# EAGLE board SPv2-twin (EAGLE 6.5.0)
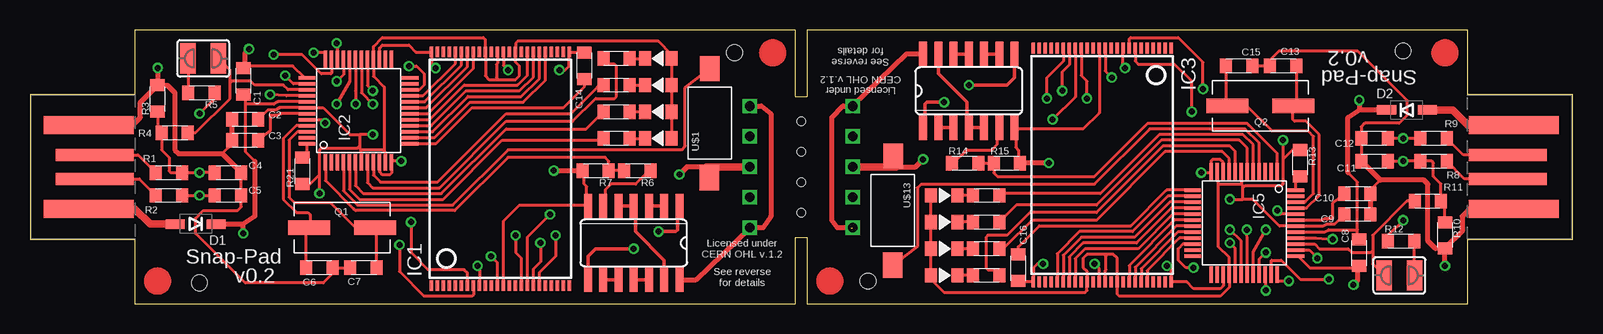
[diagram p0: board, top side]
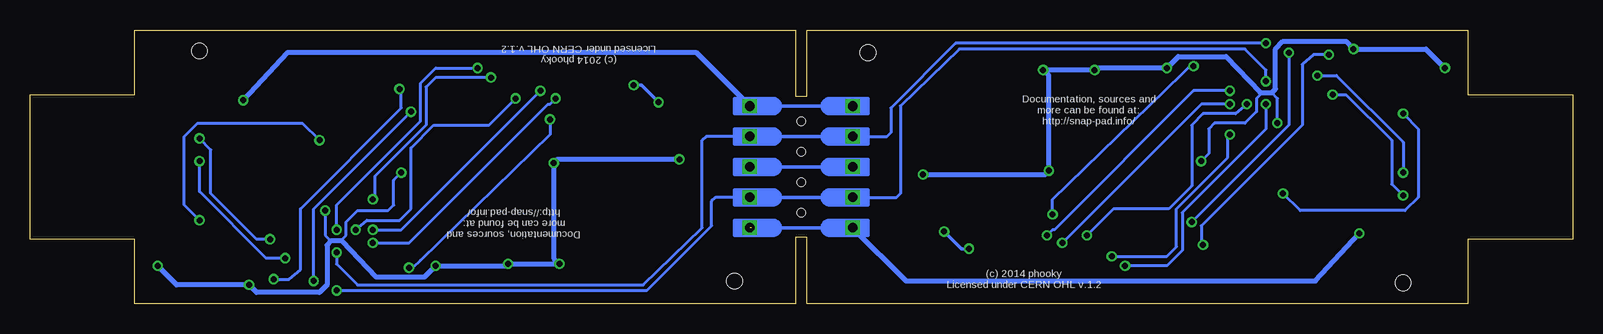
[diagram p1: board, bottom side, seen from below]

Size 128.59 x 22.86 mm. Coordinates in mm from the lower left corner, seen from the top.
Outline: 8.73,0 63.82,0 63.82,5.56 64.77,5.56 64.77,0 119.86,0 119.86,5.4 128.59,5.4 128.59,17.46 119.86,17.46 119.86,22.86 64.77,22.86 64.77,17.3 63.82,17.3 63.82,22.86 8.73,22.86 8.73,17.46 0,17.46 0,5.4 8.73,5.4 8.73,0
Copper layers (1*16): Top 0.0356mm / dielectric 1.5011mm / Bottom 0.0356mm
Design rules "LaenPCBOrder": minimum track width 6mil, minimum drill 13mil, track to track 6mil, track to pad 6mil, pad to pad 6mil, via to via 6mil, smd to smd 6mil, copper to edge 15mil, drill to drill 6mil, minimum pad ring 7mil, minimum via ring 7mil, stop-mask expansion 3mil, vias tented up to drill 0mil, thermal gap 10mil
Holes 1.3 mm at 14.13,1.75 58.74,20.95 114.46,21.11 69.85,1.91
Holes 0.7 mm at 64.29,15.24 64.29,12.7 64.29,10.16 64.29,7.62

## Footprints (pad centres in the part's own frame; a part is rotated, then mirrored left to right if it is on the bottom)
R0805 = smd 1 x 1.2: P$1 1.1,0; P$2 -1.1,0
SOD123 = smd 1.6 x 0.8: ANODE 1.7,0; CATHODE -1.7,0
TSOP48 = smd 0.9 x 0.3: 1 -9.75,5.75; 2 -9.75,5.25; 3 -9.75,4.75; 4 -9.75,4.25; 5 -9.75,3.75; 6 -9.75,3.25; 7 -9.75,2.75; 8 -9.75,2.25; 9 -9.75,1.75; 10 -9.75,1.25; 11 -9.75,0.75; 12 -9.75,0.25; 13 -9.75,-0.25; 14 -9.75,-0.75; 15 -9.75,-1.25; 16 -9.75,-1.75; 17 -9.75,-2.25; 18 -9.75,-2.75; 19 -9.75,-3.25; 20 -9.75,-3.75; 21 -9.75,-4.25; 22 -9.75,-4.75; 23 -9.75,-5.25; 24 -9.75,-5.75; 25 9.75,-5.75; 26 9.75,-5.25; 27 9.75,-4.75; 28 9.75,-4.25; 29 9.75,-3.75; 30 9.75,-3.25; 31 9.75,-2.75; 32 9.75,-2.25; 33 9.75,-1.75; 34 9.75,-1.25; 35 9.75,-0.75; 36 9.75,-0.25; 37 9.75,0.25; 38 9.75,0.75; 39 9.75,1.25; 40 9.75,1.75; 41 9.75,2.25; 42 9.75,2.75; 43 9.75,3.25; 44 9.75,3.75; 45 9.75,4.25; 46 9.75,4.75; 47 9.75,5.25; 48 9.75,5.75
PT48 = smd 1.4 x 0.3: 1 -4.3,2.75; 2 -4.3,2.25; 3 -4.3,1.75; 4 -4.3,1.25; 5 -4.3,0.75; 6 -4.3,0.25; 7 -4.3,-0.25; 8 -4.3,-0.75; 9 -4.3,-1.25; 10 -4.3,-1.75; 11 -4.3,-2.25; 12 -4.3,-2.75; 25 4.3,-2.75; 26 4.3,-2.25; 27 4.3,-1.75; 28 4.3,-1.25; 29 4.3,-0.75; 30 4.3,-0.25; 31 4.3,0.25; 32 4.3,0.75; 33 4.3,1.25; 34 4.3,1.75; 35 4.3,2.25; 36 4.3,2.75 | smd 0.3 x 1.4: 13 -2.75,-4.3; 14 -2.25,-4.3; 15 -1.75,-4.3; 16 -1.25,-4.3; 17 -0.75,-4.3; 18 -0.25,-4.3; 19 0.25,-4.3; 20 0.75,-4.3; 21 1.25,-4.3; 22 1.75,-4.3; 23 2.25,-4.3; 24 2.75,-4.3; 37 2.75,4.3; 38 2.25,4.3; 39 1.75,4.3; 40 1.25,4.3; 41 0.75,4.3; 42 0.25,4.3; 43 -0.25,4.3; 44 -0.75,4.3; 45 -1.25,4.3; 46 -1.75,4.3; 47 -2.25,4.3; 48 -2.75,4.3
SO14 = smd 0.66 x 2.032: 1 -3.81,-3.073; 2 -2.54,-3.073; 3 -1.27,-3.073; 4 0,-3.073; 5 1.27,-3.073; 6 2.54,-3.073; 7 3.81,-3.073; 8 3.81,3.073; 9 2.54,3.073; 10 1.27,3.073; 11 0,3.073; 12 -1.27,3.073; 13 -2.54,3.073; 14 -3.81,3.073
USB-A-PCB = smd 7.5 x 1.5: 5V -0.2,-3.5; GND -0.2,3.5 | smd 6.5 x 1: USB_M 0.3,-1; USB_P 0.3,1
CSM-3X = smd 3.5 x 1.2: P$1 -2.75,0; P$2 2.75,0
SJW = smd 1.27 x 2.54: 1 -1.27,0; 2 1.27,0
FSMSM = smd 2.1 x 1.6: P$1 -4.55,0.05; P$2 4.55,0
SNAP-HALF = drill 0.8 square: P$1 -3.81,5.08; P$2 -3.81,2.54; P$3 -3.81,0; P$4 -3.81,-2.54; P$5 -3.81,-5.08
LED0805 = smd 1 x 1.2: ANODE -1.1,0; CATHODE 1.1,0

## Placement (x,y rotation side)
C1  4.7uF  [R0805]  17.78,18.57 270 top
C2  220nF  [R0805]  17.94,15.4 0 top
C3  220nF  [R0805]  17.94,13.65 0 top
C4  10pF  [R0805]  16.51,10.95 180 top
C5  10pF  [R0805]  16.51,9.05 180 top
C6  20pF  [R0805]  24.13,3.02 0 top
C7  20pF  [R0805]  27.78,3.02 180 top
C8  4.7uF  [R0805]  110.81,4.29 90 top
C9  220nF  [R0805]  110.65,7.46 180 top
C10  220nF  [R0805]  110.65,9.21 180 top
C11  10pF  [R0805]  112.08,11.91 0 top
C12  10pF  [R0805]  112.08,13.81 0 top
C13  20pF  [R0805]  104.46,19.84 180 top
C14  470nF  [R0805]  46.2,19.84 270 top
C15  20pF  [R0805]  100.81,19.84 0 top
C16  470nF  [R0805]  82.39,3.02 90 top
D1  [SOD123]  13.81,6.67 180 top
D2  [SOD123]  114.78,16.19 0 top
IC1  S34ML0XG1  [TSOP48]  39.21,11.27 90 top
IC2  F5508  [PT48]  27.38,16.12 90 top
IC3  S34ML0XG1  [TSOP48]  89.38,11.59 270 top
IC4  74LS14D  [SO14]  50.32,5.08 180 top
IC5  F5508  [PT48]  101.21,6.74 270 top
IC6  74LS14D  [SO14]  78.26,17.78 0 top
JP1  USBPCB  [USB-A-PCB]  5.08,11.43 0 top
JP2  USBPCB  [USB-A-PCB]  123.51,11.43 180 top
Q1  12MHz  [CSM-3X]  26.04,6.35 0 top
Q2  12MHz  [CSM-3X]  102.55,16.51 180 top
R1  27 5%  [R0805]  11.59,10.95 0 top
R2  27 5%  [R0805]  11.59,9.05 0 top
R3  1M  [R0805]  10.64,17.14 90 top
R4  1.4K 1%  [R0805]  12.06,14.29 180 top
R5  100 5%  [R0805]  14.29,17.62 180 top
R6  1.4k  [R0805]  50.64,11.11 180 top
R7  1.4k  [R0805]  47.15,11.11 180 top
R8  27 5%  [R0805]  117,11.91 180 top
R9  27 5%  [R0805]  117,13.81 180 top
R10  1M  [R0805]  117.95,5.71 270 top
R11  1.4K 1%  [R0805]  116.52,8.57 0 top
R12  100 5%  [R0805]  114.3,5.24 0 top
R13  1M  [R0805]  105.89,11.75 270 top
R14  1.4k  [R0805]  77.95,11.75 0 top
R15  1.4k  [R0805]  81.44,11.75 0 top
R21  1M  [R0805]  22.7,11.11 90 top
SJ1  [SJW]  14.45,20.48 180 top
SJ2  [SJW]  114.14,2.38 0 top
U$1  FSMSM  [FSMSM]  56.67,15.08 90 top
U$2  SNAP-HALF  [SNAP-HALF]  63.82,11.43 180 bottom
U$3  FIDUCAL  [FIDUCAL]  10.64,1.91 0 top
U$4  130  [R0805]  48.9,13.81 0 top
U$5  LED  [LED0805]  52.39,13.81 180 top
U$6  LED  [LED0805]  52.39,16.03 180 top
U$7  LED  [LED0805]  52.39,20.48 180 top
U$8  LED  [LED0805]  52.39,18.26 180 top
U$9  130  [R0805]  48.9,16.03 0 top
U$10  130  [R0805]  48.9,20.48 0 top
U$11  130  [R0805]  48.9,18.26 0 top
U$12  FIDUCAL  [FIDUCAL]  61.91,20.95 0 top
U$13  FSMSM  [FSMSM]  71.91,7.78 270 top
U$14  LED  [LED0805]  76.2,9.05 0 top
U$15  LED  [LED0805]  76.2,6.83 0 top
U$16  LED  [LED0805]  76.2,2.38 0 top
U$17  LED  [LED0805]  76.2,4.6 0 top
U$18  130  [R0805]  79.69,9.05 180 top
U$19  130  [R0805]  79.69,6.83 180 top
U$20  130  [R0805]  79.69,2.38 180 top
U$21  130  [R0805]  79.69,4.6 180 top
U$22  SNAP-HALF  [SNAP-HALF]  64.77,11.43 0 bottom
U$23  FIDUCAL  [FIDUCAL]  117.95,20.95 180 top
U$24  FIDUCAL  [FIDUCAL]  66.67,1.91 180 top

## Library data of the parts
C1-C16 D1 D2 Q1 Q2 R1-R15 R21 U$1-U$24 = Passives
IC1 IC3 = Flash
IC2 IC5 = TI_MSP430_v16
IC4 IC6 = 74xx-us
JP1 JP2 = SparkFun-Connectors
SJ1 SJ2 = jumper

## Nets
!CE!_A: IC1.9 IC2.32
!CE!_A1: IC3.9 IC5.32
!RE!_A: IC1.8 IC2.35
!RE!_A1: IC3.8 IC5.35
!RST_A!: IC2.48 R21.P$1
!RST_A!1: IC5.48 R13.P$1
!WE!_A: IC1.18 IC2.30
!WE!_A1: IC3.18 IC5.30
!WP!_A: IC1.19 IC2.29
!WP!_A1: IC3.19 IC5.29
+1V8_A: C3.P$1 IC2.43
+1V8_A1: C10.P$1 IC5.43
+3V3_A: C2.P$1 IC1.12 IC1.34 IC1.37 IC1.39 IC2.7 IC2.11 IC2.28 IC2.42 R5.P$2 R21.P$2 U$5.ANODE U$6.ANODE U$7.ANODE U$8.ANODE
+3V3_A1: C9.P$1 IC3.12 IC3.34 IC3.37 IC3.39 IC5.7 IC5.11 IC5.28 IC5.42 R12.P$2 R13.P$2 U$14.ANODE U$15.ANODE U$16.ANODE U$17.ANODE
ALE_A: IC1.17 IC2.22
ALE_A1: IC3.17 IC5.22
CLE_A: IC1.16 IC2.31
CLE_A1: IC3.16 IC5.31
D+_A: C4.P$1 IC2.38 R1.P$1 R3.P$2 R4.P$1
D+_A1: C11.P$1 IC5.38 R8.P$1 R10.P$2 R11.P$1
D-_A: C5.P$1 IC2.40 R2.P$1
D-_A1: C12.P$1 IC5.40 R9.P$1
DOUT: IC2.1 R6.P$1 R7.P$2
DOUT1: IC5.1 R14.P$1 R15.P$2
GND: C1.P$2 C2.P$2 C3.P$2 C4.P$2 C5.P$2 C6.P$1 C7.P$1 C8.P$2 C9.P$2 C10.P$2 C11.P$2 C12.P$2 C13.P$1 C14.P$2 C15.P$1 C16.P$2 IC1.13 IC1.25 IC1.36 IC1.48 IC2.10 IC2.12 IC2.27 IC2.37 IC2.44 IC3.13 IC3.25 IC3.36 IC3.48 IC4.7 IC5.10 IC5.12 IC5.27 IC5.37 IC5.44 IC6.7 JP1.GND JP2.GND R3.P$1 R7.P$1 R10.P$1 R15.P$1 U$1.P$1 U$2.P$3 U$13.P$1 U$22.P$3
N$1: JP1.USB_P R1.P$2
N$2: JP1.USB_M R2.P$2
N$3: C14.P$1 IC2.13
N$4: R5.P$1 SJ1.2
N$5: IC4.11 IC4.12
N$6: IC4.9 IC4.10
N$7: IC4.1 IC4.8
N$8: IC4.2 IC4.3
N$9: IC4.4 IC4.5 IC4.13
N$10: IC4.6 R6.P$2
N$11: JP2.USB_P R8.P$2
N$12: JP2.USB_M R9.P$2
N$13: C16.P$1 IC5.13
N$14: U$16.CATHODE U$20.P$1
N$15: U$15.CATHODE U$19.P$1
N$16: U$14.CATHODE U$18.P$1
N$17: U$17.CATHODE U$21.P$1
N$18: IC5.9 U$21.P$2
N$19: IC2.9 U$11.P$2
N$20: IC5.8 U$20.P$2
N$21: IC5.6 U$19.P$2
N$22: U$7.CATHODE U$10.P$1
N$23: U$6.CATHODE U$9.P$1
N$24: U$4.P$1 U$5.CATHODE
N$25: U$8.CATHODE U$11.P$1
N$26: IC2.8 U$10.P$2
N$27: IC2.6 U$9.P$2
N$28: IC2.5 U$4.P$2
N$29: IC5.5 U$18.P$2
N$30: R12.P$1 SJ2.2
N$31: D2.ANODE JP2.5V
N$32: IC6.11 IC6.12
N$33: D1.ANODE JP1.5V
N$34: IC6.9 IC6.10
N$35: IC6.1 IC6.8
N$36: IC6.2 IC6.3
N$37: IC6.4 IC6.5 IC6.13
N$38: IC6.6 R14.P$2
NANDIO_A0: IC1.29 IC2.14
NANDIO_A1: IC1.30 IC2.15
NANDIO_A2: IC1.31 IC2.16
NANDIO_A3: IC1.32 IC2.17
NANDIO_A4: IC1.41 IC2.18
NANDIO_A5: IC1.42 IC2.19
NANDIO_A6: IC1.43 IC2.20
NANDIO_A7: IC1.44 IC2.21
NANDIO_A8: IC3.29 IC5.14
NANDIO_A9: IC3.30 IC5.15
NANDIO_A10: IC3.31 IC5.16
NANDIO_A11: IC3.32 IC5.17
NANDIO_A12: IC3.41 IC5.18
NANDIO_A13: IC3.42 IC5.19
NANDIO_A14: IC3.43 IC5.20
NANDIO_A15: IC3.44 IC5.21
PUR_A: IC2.39 R4.P$2 SJ1.1
PUR_A1: IC5.39 R11.P$2 SJ2.1
R/B_A: IC1.7 IC2.36
R/B_A1: IC3.7 IC5.36
RX_A: IC2.34 IC5.33 U$2.P$4 U$22.P$2
SW_A: IC2.4 U$1.P$2
SW_A1: IC5.4 U$13.P$2
TCK_A: IC2.26
TCK_A1: IC5.26
TDI_A: IC2.24
TDI_A1: IC5.24
TDO_A: IC2.23
TDO_A1: IC5.23
TMS_A: IC2.25
TMS_A1: IC5.25
TST_A: IC2.47
TST_A1: IC5.47
TX_A: IC2.33 IC5.34 U$2.P$2 U$22.P$4
VBUS: C1.P$1 C8.P$1 D1.CATHODE D2.CATHODE IC2.41 IC4.14 IC5.41 IC6.14 U$2.P$1 U$2.P$5 U$22.P$1 U$22.P$5
XT2IN_A: C6.P$2 IC2.45 Q1.P$1
XT2IN_A1: C13.P$2 IC5.45 Q2.P$1
XT2OUT_A: C7.P$2 IC2.46 Q1.P$2
XT2OUT_A1: C15.P$2 IC5.46 Q2.P$2

## Tracks (layer width: path | path; a pad name or v marks a point on that pad's centre or on a via)
!CE!_A  (via drill 0.5)
  Top 0.254: IC2.32 26.63,18.53 v25.56,16.67 | v37.31,3.17 37.47,3.02 IC1.9
  Bottom 0.254: v25.56,16.67 25.56,14.61 32.54,7.62 32.54,4.45 33.81,3.17 v37.31,3.17
!CE!_A1  (via drill 0.5)
  Top 0.254: IC5.32 101.96,4.33 v103.03,6.19 | v91.28,19.68 91.12,19.84 IC3.9
  Bottom 0.254: v103.03,6.19 103.03,8.26 96.04,15.24 96.04,18.41 94.77,19.68 v91.28,19.68
!RE!_A  (via drill 0.5)
  Top 0.254: IC2.35 25.13,19.25 25.08,19.21 24.29,19.21 22.7,20.8 v20.32,20.8 | v30.8,4.92 30.8,2.7 32.86,0.64 36.83,0.64 36.96,0.77 IC1.8
  Bottom 0.254: v20.32,20.8 21.59,20.8 22.54,20 22.54,14.92 30.96,6.51 30.96,5.08 v30.8,4.92
!RE!_A1  (via drill 0.5)
  Top 0.254: IC5.35 103.46,3.6 103.5,3.65 104.3,3.65 105.89,2.06 v108.27,2.06 | v97.79,17.94 97.79,20.16 95.73,22.23 91.76,22.23 91.63,22.09 IC3.8
  Bottom 0.254: v108.27,2.06 107,2.06 106.05,2.86 106.05,7.94 97.63,16.35 97.63,17.78 v97.79,17.94
!RST_A!
  Top 0.254: IC2.48 23.08,12.59 R21.P$1
!RST_A!1
  Top 0.254: IC5.48 105.51,10.27 R13.P$1
!WE!_A  (via drill 0.5)
  Top 0.254: IC2.30 27.63,17.61 v28.57,16.67 | v42.55,5.08 42.55,3.49 41.96,2.91 IC1.18
  Bottom 0.254: v28.57,16.67 30.96,16.67 v42.55,5.08
!WE!_A1  (via drill 0.5)
  Top 0.254: IC5.30 100.96,5.25 v100.01,6.19 | v86.04,17.78 86.04,19.37 86.63,19.95 IC3.18
  Bottom 0.254: v100.01,6.19 97.63,6.19 v86.04,17.78
!WP!_A  (via drill 0.5)
  Top 0.254: IC2.29 28.13,18.23 v28.57,17.78 | v43.81,5.71 43.81,3.97 42.46,2.62 IC1.19
  Bottom 0.254: v28.57,17.78 31.59,17.78 43.18,6.19 43.34,6.19 v43.81,5.71
!WP!_A1  (via drill 0.5)
  Top 0.254: IC5.29 100.46,4.63 v100.01,5.08 | v84.77,17.14 84.77,18.89 86.13,20.25 IC3.19
  Bottom 0.254: v100.01,5.08 97,5.08 85.41,16.67 85.25,16.67 v84.77,17.14
+1V8_A
  Top 0.254: IC2.43 20.95,15.87 20.64,15.72 20,15.72 20,14.45 19.37,13.98 C3.P$1
+1V8_A1
  Top 0.254: IC5.43 107.64,6.99 107.95,7.14 108.58,7.14 108.58,8.41 109.22,8.88 C10.P$1
+3V3_A  (via drill 0.5)
  Top 0.254: IC2.11 29.63,12.6 29.53,12.86 | 29.53,12.86 27.62,12.86 | IC2.7 27.63,12.55 27.62,12.86 | U$5.ANODE U$6.ANODE U$8.ANODE U$7.ANODE 53.49,20.81 52.39,21.91 40.64,21.91 40.48,21.75 40.48,21.04 IC1.34 40.48,21 40.48,20.16 40.8,19.84 40.8,19.05 40.48,18.73 39.05,18.73 | IC1.37 38.96,20.07 38.89,20 38.89,18.89 39.05,18.73 | 39.05,18.73 38.26,18.73 37.96,19.03 IC1.39 37.94,21.04 37.94,22.07 37.78,22.23 29.37,22.23 28.63,21.48 IC2.28 28.63,19 29.53,18.1 29.53,12.86 | C2.P$1 19.83,16.19 20.48,16.19 20.81,16.37 IC2.42 24.43,16.37 26.67,14.13 27.46,14.13 | 27.62,12.86 27.46,13.02 27.46,13.18 | 27.46,14.13 27.46,13.18 | IC1.12 38.96,3.42 v38.42,3.97 | v28.57,14.13 27.46,14.13 | R21.P$2 23.35,10.01 24.13,10.79 | 24.13,10.79 24.13,12.86 24.29,13.02 27.3,13.02 27.46,13.18 | R5.P$2 15.39,17.13 v14.13,15.88 | v24.13,9.21 24.13,10.79
  Bottom 0.254: v38.42,3.97 33.81,3.97 33.02,4.76 33.02,7.94 28.73,12.22 28.73,13.97 v28.57,14.13 | v14.13,15.88 12.86,14.61 12.86,8.89 13.97,7.78 22.7,7.78 v24.13,9.21
+3V3_A1  (via drill 0.5)
  Top 0.254: IC5.11 98.96,10.26 99.06,10 | 99.06,10 100.97,10 | IC5.7 100.96,10.31 100.97,10 | U$14.ANODE U$15.ANODE U$17.ANODE U$16.ANODE 75.1,2.05 76.2,0.95 87.95,0.95 88.11,1.11 88.11,1.82 IC3.34 88.11,1.86 88.11,2.7 87.79,3.02 87.79,3.81 88.11,4.13 89.53,4.13 | IC3.37 89.63,2.79 89.69,2.86 89.69,3.97 89.53,4.13 | 89.53,4.13 90.33,4.13 90.63,3.83 IC3.39 90.65,1.82 90.65,0.79 90.81,0.64 99.22,0.64 99.96,1.38 IC5.28 99.96,3.86 99.06,4.76 99.06,10 | C9.P$1 108.75,6.67 108.11,6.67 107.77,6.49 IC5.42 104.16,6.49 101.92,8.73 101.12,8.73 | 100.97,10 101.12,9.84 101.12,9.68 | 101.12,8.73 101.12,9.68 | IC3.12 89.63,19.43 v90.17,18.89 | v100.01,8.73 101.12,8.73 | R13.P$2 105.24,12.85 104.46,12.06 | 104.46,12.06 104.46,10 104.3,9.84 101.28,9.84 101.12,9.68 | R12.P$2 113.2,5.73 v114.46,6.99 | v104.46,13.65 104.46,12.06
  Bottom 0.254: v90.17,18.89 94.77,18.89 95.57,18.1 95.57,14.92 99.85,10.64 99.85,8.89 v100.01,8.73 | v114.46,6.99 115.73,8.26 115.73,13.97 114.62,15.08 105.89,15.08 v104.46,13.65
ALE_A  (via drill 0.5)
  Top 0.254: IC1.17 41.46,5.58 v43.34,7.46 | v31.59,19.84 32.23,19.84 32.86,19.21 32.86,18.26 32.47,17.87 IC2.22
  Bottom 0.254: v43.34,7.46 43.34,8.73 32.54,19.21 31.91,19.84 v31.59,19.84
ALE_A1  (via drill 0.5)
  Top 0.254: IC3.17 87.13,17.28 v85.25,15.4 | v97,3.02 96.36,3.02 95.73,3.65 95.73,4.6 96.11,4.99 IC5.22
  Bottom 0.254: v85.25,15.4 85.25,14.13 96.04,3.65 96.68,3.02 v97,3.02
CLE_A  (via drill 0.5)
  Top 0.254: IC2.31 27.13,17.76 v27.15,16.67 | IC1.16 40.96,3.81 40.48,4.29 v40.48,5.71
  Bottom 0.254: v27.15,16.67 28.1,15.88 30.8,15.88 31.75,14.92 31.75,9.84 33.66,7.94 38.26,7.94 v40.48,5.71
CLE_A1  (via drill 0.5)
  Top 0.254: IC5.31 101.46,5.1 v101.44,6.19 | IC3.16 87.63,19.05 88.11,18.57 v88.11,17.14
  Bottom 0.254: v101.44,6.19 100.49,6.99 97.79,6.99 96.84,7.94 96.84,13.02 94.93,14.92 90.33,14.92 v88.11,17.14
D+_A  (via drill 0.5)
  Top 0.254: C4.P$1 v14.13,10.95 R1.P$1 11.75,10.95 11.59,11.11 11.59,12.22 10.96,12.85 R4.P$1 10.64,14.62 R3.P$2 | IC2.38 21.95,18.37 v21.27,19.05
  Bottom 0.254: 14.13,11.34 v14.13,10.95 14.13,13.49 19.68,19.05 v21.27,19.05
D+_A1  (via drill 0.5)
  Top 0.254: C11.P$1 v114.46,11.91 R8.P$1 116.84,11.91 117,11.75 117,10.64 117.62,10.01 R11.P$1 117.95,8.24 R10.P$2 | IC5.38 106.63,4.49 v107.31,3.81
  Bottom 0.254: 114.46,11.52 v114.46,11.91 114.46,9.37 108.9,3.81 v107.31,3.81
D-_A  (via drill 0.5)
  Top 0.254: IC2.40 21.37,17.37 v20,17.46 | C5.P$1 v14.13,9.05 R2.P$1
  Bottom 0.254: v20,17.46 18.89,17.46 15.08,13.65 15.08,10 v14.13,9.05
D-_A1  (via drill 0.5)
  Top 0.254: IC5.40 107.22,5.49 v108.58,5.4 | C12.P$1 v114.46,13.81 R9.P$1
  Bottom 0.254: v108.58,5.4 109.7,5.4 113.51,9.21 113.51,12.86 v114.46,13.81
DOUT
  Top 0.254: IC2.1 24.63,10.3 26.99,7.94 27.15,7.78 35.4,7.78 39.85,12.22 47.94,12.22 48.25,11.92 R7.P$2 R6.P$1
DOUT1
  Top 0.254: IC5.1 103.96,12.56 101.6,14.92 101.44,15.08 93.19,15.08 88.74,10.64 80.64,10.64 80.34,10.94 R15.P$2 R14.P$1
GND  (via drill 0.5)
  Top 0.254: IC2.10 29.13,11.04 29.37,10.79 30,10.79 30.13,10.92 IC2.12 30.22,11.91 v30.96,11.91 | IC1.36 39.46,19.91 v39.85,19.53 | v44.13,19.53 44.61,19.53 44.93,19.84 44.93,20.99 IC1.25 46.12,21.02 C14.P$2 | IC1.13 39.46,6.92 40.8,8.26 46.41,8.26 | 46.41,8.26 IC4.7 | IC2.27 29.13,21.35 29.37,21.59 31.59,21.59 32.16,21.02 IC1.48 33.46,20.04 v33.81,19.68 | IC2.37 22.88,18.87 21.91,19.84 17.95,19.84 C1.P$2 | C4.P$2 C5.P$2 17.62,9.04 17.62,8.1 17.3,7.78 14.45,7.78 13.81,7.14 13.81,5.87 17.94,1.75 24.45,1.75 25.23,2.53 C6.P$1 C7.P$1 | 46.41,8.26 46.41,9.79 46.2,10 46.2,10.96 R7.P$1 | C3.P$2 16.84,13.36 16.02,12.54 | IC2.44 24.32,15.37 v24.61,15.08 | IC5.10 99.46,11.82 99.22,12.06 98.58,12.06 98.46,11.94 IC5.12 98.37,10.95 v97.63,10.95 | IC3.36 89.13,2.95 v88.74,3.33 | v84.45,3.33 83.98,3.33 83.66,3.02 83.66,1.87 IC3.25 82.47,1.84 C16.P$2 | IC3.13 89.13,15.94 87.79,14.61 82.17,14.61 | 82.17,14.61 IC6.7 | IC5.27 99.46,1.51 99.22,1.27 97,1.27 96.43,1.84 IC3.48 95.13,2.82 v94.77,3.17 | IC5.37 105.7,3.99 106.68,3.02 110.64,3.02 C8.P$2 | C11.P$2 C12.P$2 110.97,13.82 110.97,14.76 111.28,15.08 114.14,15.08 114.78,15.72 114.78,16.99 110.65,21.11 104.14,21.11 103.36,20.33 C13.P$1 C15.P$1 | 82.17,14.61 82.17,13.07 82.39,12.86 82.39,11.89 R15.P$1 | C10.P$2 111.75,9.5 112.56,10.32 | IC5.44 104.27,7.49 v103.98,7.78
  Top 0.406: JP1.GND 8.58,14.93 9.21,15.56 9.21,16.82 R3.P$1 | R3.P$1 11.44,18.25 12.06,17.62 12.06,12.86 12.38,12.54 16.02,12.54 C4.P$2 17.79,11.13 | C3.P$2 C2.P$2 | 56.41,11.43 54.77,11.43 v54.13,10.79 | v43.66,11.11 R7.P$1 | v10.64,19.68 R3.P$1 | 17.95,19.84 17.95,20.97 v18.26,21.27 | JP2.GND 120.01,7.93 119.38,7.3 119.38,6.04 R10.P$1 | R10.P$1 117.15,4.62 116.52,5.24 116.52,10 116.2,10.32 112.56,10.32 C11.P$2 110.8,11.72 | C10.P$2 C9.P$2 | 72.18,11.43 73.82,11.43 v74.45,12.06 | v84.93,11.75 R15.P$1 | v117.95,3.17 R10.P$1 | 110.64,3.02 110.64,1.89 v110.33,1.59
  Top 0.61: 56.41,11.43 U$1.P$1 56.41,11.43 | U$2.P$3 56.41,11.43 | 72.18,11.43 U$13.P$1 72.02,11.43 U$22.P$3
  Bottom 0.254: 39.69,19.68 v39.85,19.53 | 26.04,17.62 26.04,17.46 26.35,17.14 26.35,16.03 27.3,15.08 29.84,15.08 30.32,14.61 30.32,12.54 v30.96,11.91 | v24.61,15.08 24.61,17.14 25.08,17.62 | 88.9,3.17 v88.74,3.33 | 102.55,5.24 102.55,5.4 102.23,5.71 102.23,6.83 101.28,7.78 98.74,7.78 98.27,8.26 98.27,10.32 v97.63,10.95 | v103.98,7.78 103.98,5.71 103.5,5.24
  Bottom 0.305: U$2.P$3 U$22.P$3
  Bottom 0.406: v39.85,19.53 v44.13,19.53 43.66,19.05 v43.66,11.11 43.97,10.79 v54.13,10.79 | 39.69,19.68 v33.81,19.68 32.86,20.64 28.89,20.64 26.04,17.62 25.08,17.62 24.77,17.94 24.77,21.27 24.13,21.91 18.89,21.91 v18.26,21.27 12.22,21.27 v10.64,19.68 | v88.74,3.33 v84.45,3.33 84.93,3.81 v84.93,11.75 84.61,12.06 v74.45,12.06 | 88.9,3.17 v94.77,3.17 95.73,2.22 99.69,2.22 102.55,5.24 103.5,5.24 103.82,4.92 103.82,1.59 104.46,0.95 109.7,0.95 v110.33,1.59 116.36,1.59 v117.95,3.17
N$1
  Top 0.254: JP1.USB_P 9.01,12.43 R1.P$2
N$2
  Top 0.254: JP1.USB_M 9.11,10.43 R2.P$2
N$3
  Top 0.254: C14.P$1 46.2,18.1 44.45,16.35 36.83,16.35 33.85,13.37 IC2.13
N$4
  Top 0.254: SJ1.2 13.18,17.63 R5.P$1
N$5
  Top 0.305: IC4.11 IC4.12
N$6
  Top 0.305: IC4.9 IC4.10
N$7  (via drill 0.5)
  Top 0.305: IC4.8 46.51,3.97 47.15,4.6 v50.32,4.6 | v52.39,6.03 53.82,6.03 53.98,6.19 53.98,8 IC4.1
  Bottom 0.305: v50.32,4.6 50.96,4.6 v52.39,6.03
N$8
  Top 0.305: IC4.3 IC4.2
N$9
  Top 0.305: IC4.5 IC4.4 50.48,8 50.48,6.03 52.86,3.65 IC4.13
N$10
  Top 0.254: R6.P$2 51.59,11.11 50.48,10 48.42,10 47.94,9.53 47.94,8.31 IC4.6
N$11
  Top 0.254: JP2.USB_P 119.58,10.43 R8.P$2
N$12
  Top 0.254: JP2.USB_M 119.48,12.43 R9.P$2
N$13
  Top 0.254: C16.P$1 82.39,4.76 84.14,6.51 91.76,6.51 94.74,9.49 IC5.13
N$14
  Top 0.254: U$20.P$1 U$16.CATHODE
N$15
  Top 0.254: U$19.P$1 U$15.CATHODE
N$16
  Top 0.254: U$18.P$1 U$14.CATHODE
N$17
  Top 0.254: U$21.P$1 U$17.CATHODE
N$18
  Top 0.254: IC5.9 99.96,12.12 99.38,12.7 94.61,12.7 88.9,6.99 83.5,6.99 81.28,4.76 80.95,4.76 U$21.P$2
N$19
  Top 0.254: IC2.9 28.63,10.74 29.21,10.16 33.97,10.16 39.69,15.88 45.09,15.88 47.31,18.1 47.64,18.1 U$11.P$2
N$20
  Top 0.254: IC5.8 100.46,12.73 100.01,13.18 94.46,13.18 88.9,7.62 83.34,7.62 81.44,5.71 79.85,5.71 79.69,5.56 79.69,3.02 79.85,2.86 80.32,2.86 U$20.P$2
N$21
  Top 0.254: IC5.6 101.46,13 100.81,13.65 94.3,13.65 88.9,8.26 82.22,8.26 U$19.P$2
N$22
  Top 0.254: U$10.P$1 U$7.CATHODE
N$23
  Top 0.254: U$9.P$1 U$6.CATHODE
N$24
  Top 0.254: U$4.P$1 U$5.CATHODE
N$25
  Top 0.254: U$11.P$1 U$8.CATHODE
N$26
  Top 0.254: IC2.8 28.13,10.13 28.57,9.68 34.13,9.68 39.69,15.24 45.24,15.24 47.15,17.14 48.74,17.14 48.9,17.3 48.9,19.84 48.74,20 48.27,20 U$10.P$2
N$27
  Top 0.254: IC2.6 27.13,9.86 27.78,9.21 34.29,9.21 39.69,14.61 46.37,14.61 U$9.P$2
N$28
  Top 0.254: IC2.5 26.63,9.57 27.46,8.73 34.45,8.73 39.37,13.65 47.48,13.65 U$4.P$2
N$29
  Top 0.254: IC5.5 101.96,13.29 101.12,14.13 94.14,14.13 89.22,9.21 81.11,9.21 U$18.P$2
N$30
  Top 0.254: SJ2.2 115.41,5.23 R12.P$1
N$31
  Top 0.61: JP2.5V 119.85,14.93 118.59,16.19 D2.ANODE
N$32
  Top 0.305: IC6.11 IC6.12
N$33
  Top 0.61: JP1.5V 8.74,7.93 10,6.67 D1.ANODE
N$34
  Top 0.305: IC6.9 IC6.10
N$35  (via drill 0.5)
  Top 0.305: IC6.8 82.07,18.89 81.44,18.26 v78.26,18.26 | v76.2,16.83 74.77,16.83 74.61,16.67 74.61,14.87 IC6.1
  Bottom 0.305: v78.26,18.26 77.63,18.26 v76.2,16.83
N$36
  Top 0.305: IC6.3 IC6.2
N$37
  Top 0.305: IC6.5 IC6.4 78.11,14.87 78.11,16.83 75.72,19.21 IC6.13
N$38
  Top 0.254: R14.P$2 76.99,11.75 78.11,12.86 80.17,12.86 80.64,13.34 80.64,14.55 IC6.6
NANDIO_A0
  Top 0.254: IC2.14 33.71,13.87 36.67,16.83 41.12,16.83 42.96,18.67 IC1.29
NANDIO_A1
  Top 0.254: IC2.15 33.58,14.37 36.51,17.3 40.96,17.3 42.46,18.81 IC1.30
NANDIO_A2
  Top 0.254: IC2.16 33.44,14.87 36.35,17.78 40.8,17.78 41.96,18.94 IC1.31
NANDIO_A3
  Top 0.254: IC2.17 33.31,15.37 36.2,18.26 40.64,18.26 41.46,19.08 IC1.32
NANDIO_A4
  Top 0.254: IC2.18 33.17,15.87 36.96,19.66 IC1.41
NANDIO_A5
  Top 0.254: IC2.19 33.04,16.37 36.46,19.79 IC1.42
NANDIO_A6
  Top 0.254: IC2.20 32.9,16.87 35.96,19.93 IC1.43
NANDIO_A7
  Top 0.254: IC2.21 32.77,17.37 35.46,20.06 IC1.44
NANDIO_A8
  Top 0.254: IC5.14 94.88,8.99 91.92,6.03 87.47,6.03 85.63,4.19 IC3.29
NANDIO_A9
  Top 0.254: IC5.15 95.01,8.49 92.08,5.56 87.63,5.56 86.13,4.05 IC3.30
NANDIO_A10
  Top 0.254: IC5.16 95.14,7.99 92.23,5.08 87.79,5.08 86.63,3.92 IC3.31
NANDIO_A11
  Top 0.254: IC5.17 95.28,7.49 92.39,4.6 87.95,4.6 87.13,3.78 IC3.32
NANDIO_A12
  Top 0.254: IC5.18 95.42,6.99 91.63,3.2 IC3.41
NANDIO_A13
  Top 0.254: IC5.19 95.55,6.49 92.13,3.07 IC3.42
NANDIO_A14
  Top 0.254: IC5.20 95.69,5.99 92.63,2.93 IC3.43
NANDIO_A15
  Top 0.254: IC5.21 95.82,5.49 93.13,2.8 IC3.44
PUR_A
  Top 0.254: IC2.39 21.5,17.87 21.11,18.26 18.73,18.26 18.41,18.57 16.83,18.57 16.67,18.41 | 16.67,18.41 16.67,19.53 SJ1.1 | R4.P$2 13.81,14.29 16.67,17.14 16.67,18.41
PUR_A1
  Top 0.254: IC5.39 107.09,4.99 107.47,4.6 109.86,4.6 110.17,4.29 111.76,4.29 111.92,4.45 | 111.92,4.45 111.92,3.33 SJ2.1 | R11.P$2 114.78,8.57 111.92,5.71 111.92,4.45
R/B_A  (via drill 0.5)
  Top 0.254: IC2.36 24.63,20.61 24.61,20.95 v23.65,20.95 | v31.75,6.83 31.75,4.29 33.18,2.86 36.2,2.86 36.46,2.59 IC1.7
  Bottom 0.254: v23.65,20.95 23.65,14.92 v31.75,6.83
R/B_A1  (via drill 0.5)
  Top 0.254: IC5.36 103.96,2.25 103.98,1.91 v104.93,1.91 | v96.84,16.03 96.84,18.57 95.41,20 92.39,20 92.13,20.27 IC3.7
  Bottom 0.254: v104.93,1.91 104.93,7.94 v96.84,16.03
RX_A  (via drill 0.5)
  Top 0.254: IC2.34 25.63,21.36 v25.56,21.75 | IC5.33 102.46,3.75 v103.03,4.29
  Bottom 0.254: v25.56,21.75 51.44,21.75 56.83,16.35 56.83,14.29 57.15,13.97 U$2.P$4 | v103.03,4.29 103.03,3.33 101.28,1.59 77.47,1.59 72.55,6.35 72.55,13.65 72.23,13.97 U$22.P$2
  Bottom 0.305: U$2.P$4 U$22.P$2
SW_A
  Top 0.254: IC2.4 26.13,9.43 27.3,8.26 35.24,8.26 39.85,12.86 54.29,12.86 54.61,13.18 54.61,18.04 U$1.P$2
SW_A1
  Top 0.254: IC5.4 102.46,13.43 101.28,14.61 93.34,14.61 88.74,10 74.3,10 73.98,9.68 73.98,4.82 U$13.P$2
TX_A  (via drill 0.5)
  Top 0.254: IC2.33 26.13,19.11 v25.56,18.57 | IC5.34 102.96,1.5 v103.03,1.11
  Bottom 0.254: v25.56,18.57 25.56,19.53 27.3,21.27 51.12,21.27 56.04,16.51 56.04,9.21 56.36,8.89 U$2.P$2 | v103.03,1.11 77.15,1.11 71.75,6.51 71.75,8.57 71.44,8.89 U$22.P$4
  Bottom 0.305: U$2.P$2 U$22.P$4
VBUS  (via drill 0.5)  (1 unrouted)
  Top 0.254: IC2.41 20.68,16.87 20.32,16.67 17.94,16.67 | 17.94,16.67 17.94,12.7 18.73,11.91 | C1.P$1 17.93,17.47 17.94,17.46 17.94,16.67 | IC5.41 107.91,5.99 108.27,6.19 110.65,6.19 | 110.65,6.19 110.65,10.16 109.86,10.95 | C8.P$1 110.66,5.39 110.65,5.4 110.65,6.19
  Top 0.406: D1.CATHODE 17.78,6.67 | 18.73,11.91 18.73,7.3 17.78,6.67 | U$2.P$5 60.96,16.51 61.75,15.88 61.75,7.3 61.12,6.35 U$2.P$1 55.51,2.01 IC4.14 | v17.78,5.87 17.78,6.67 | D2.CATHODE 110.81,16.19 | 109.86,10.95 109.86,15.56 110.81,16.19 | U$22.P$5 67.31,6.35 66.83,6.99 66.83,15.56 67.79,16.51 U$22.P$1 73.08,20.85 IC6.14 | v110.81,16.99 110.81,16.19
  Bottom 0.305: U$2.P$5 U$22.P$1 | U$2.P$1 68.42,6.35
  Bottom 0.406: U$2.P$1 55.56,1.91 21.43,1.91 v17.78,5.87 | U$22.P$1 73.03,20.95 107.16,20.95 v110.81,16.99
XT2IN_A
  Top 0.254: IC2.45 22.17,14.87 21.11,13.81 21.11,8.73 22.23,7.62 23.18,7.62 23.34,7.46 23.34,6.4 Q1.P$1 23.03,6.09 C6.P$2
XT2IN_A1
  Top 0.254: IC5.45 106.42,7.99 107.47,9.05 107.47,14.13 106.36,15.24 105.41,15.24 105.25,15.4 105.25,16.46 Q2.P$1 105.56,16.77 C13.P$2
XT2OUT_A
  Top 0.254: IC2.46 22.31,14.37 21.59,13.65 21.59,8.89 22.07,8.41 25.08,8.41 27.15,6.35 Q1.P$2 28.88,6.25 C7.P$2
XT2OUT_A1
  Top 0.254: IC5.46 106.28,8.49 107,9.21 107,13.97 106.52,14.45 103.5,14.45 101.44,16.51 Q2.P$2 99.71,16.61 C15.P$2

## Text on the board
tPlace: See reverse / for details | v0.2 | Snap-Pad | Licensed under / CERN OHL v.1.2 | Licensed under / CERN OHL v.1.2 | Snap-Pad | v0.2 | See reverse / for details
bPlace: (c) 2014 phooky / Licensed under CERN OHL v.1.2 | Documentation, sources and / more can be found at: / http://snap-pad.info/ | Documentation, sources and / more can be found at: / http://snap-pad.info/ | (c) 2014 phooky / Licensed under CERN OHL v.1.2